# Altium PCB WPT_Reciever.PcbDoc
Units mil, origin at the board's own origin, x right, y up, seen from the top; angles counter-clockwise.
Board outline 1050 x 1140 mil, 2 copper layers (Top Layer, Bottom Layer); 12 components, 11 nets, 24 pads, 0 vias.
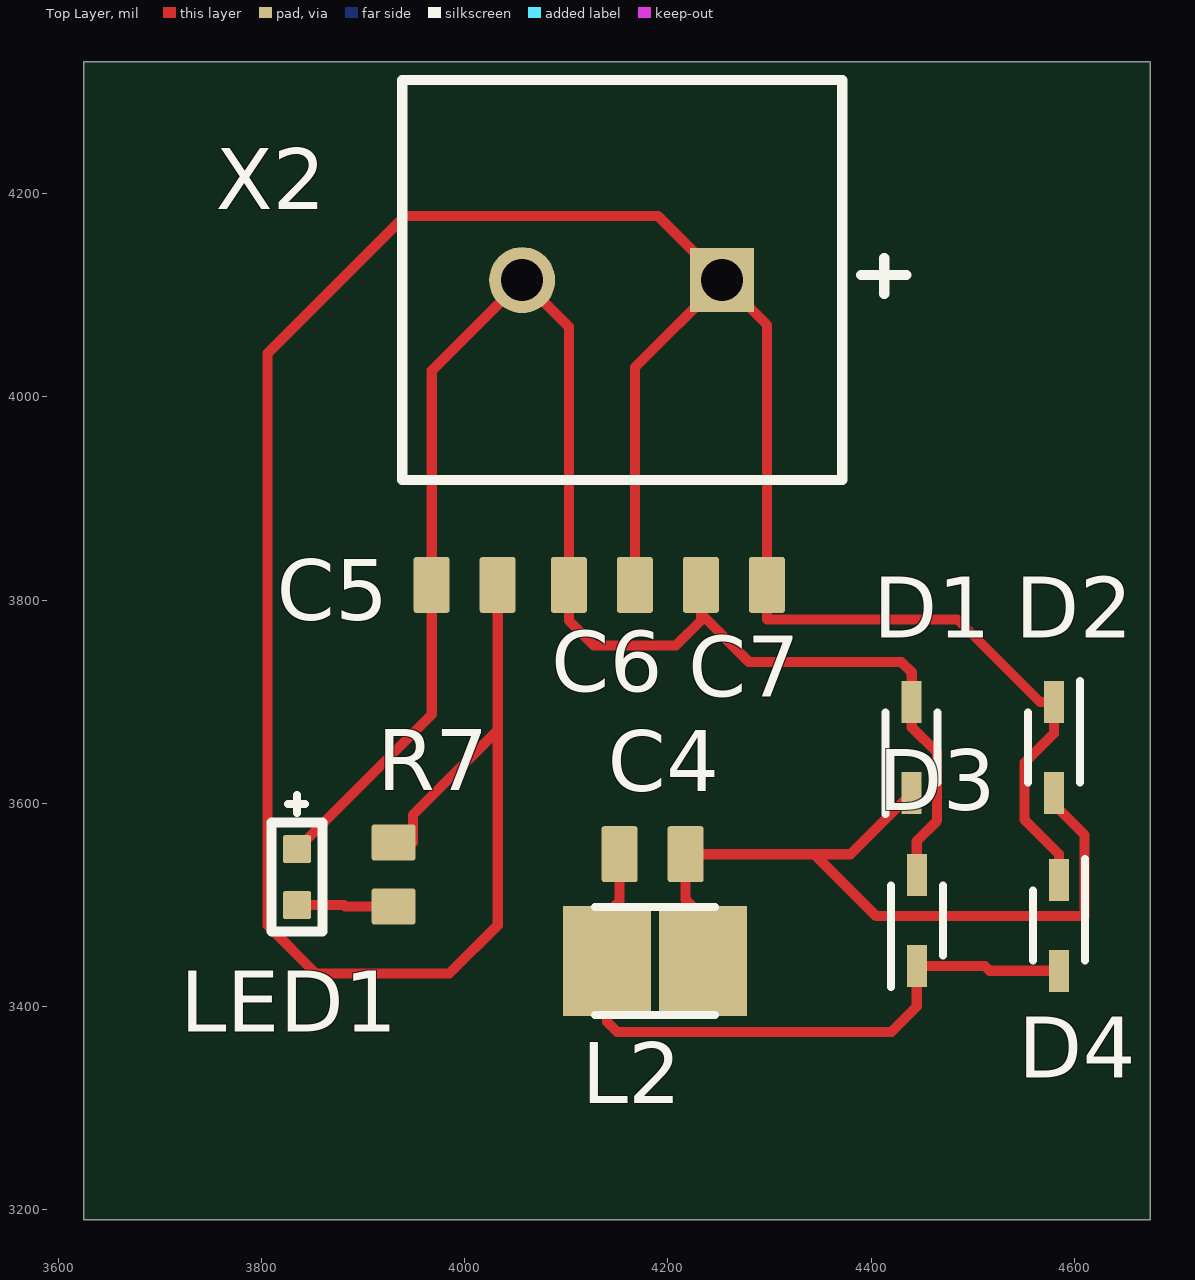
[diagram p0: Top Layer view]
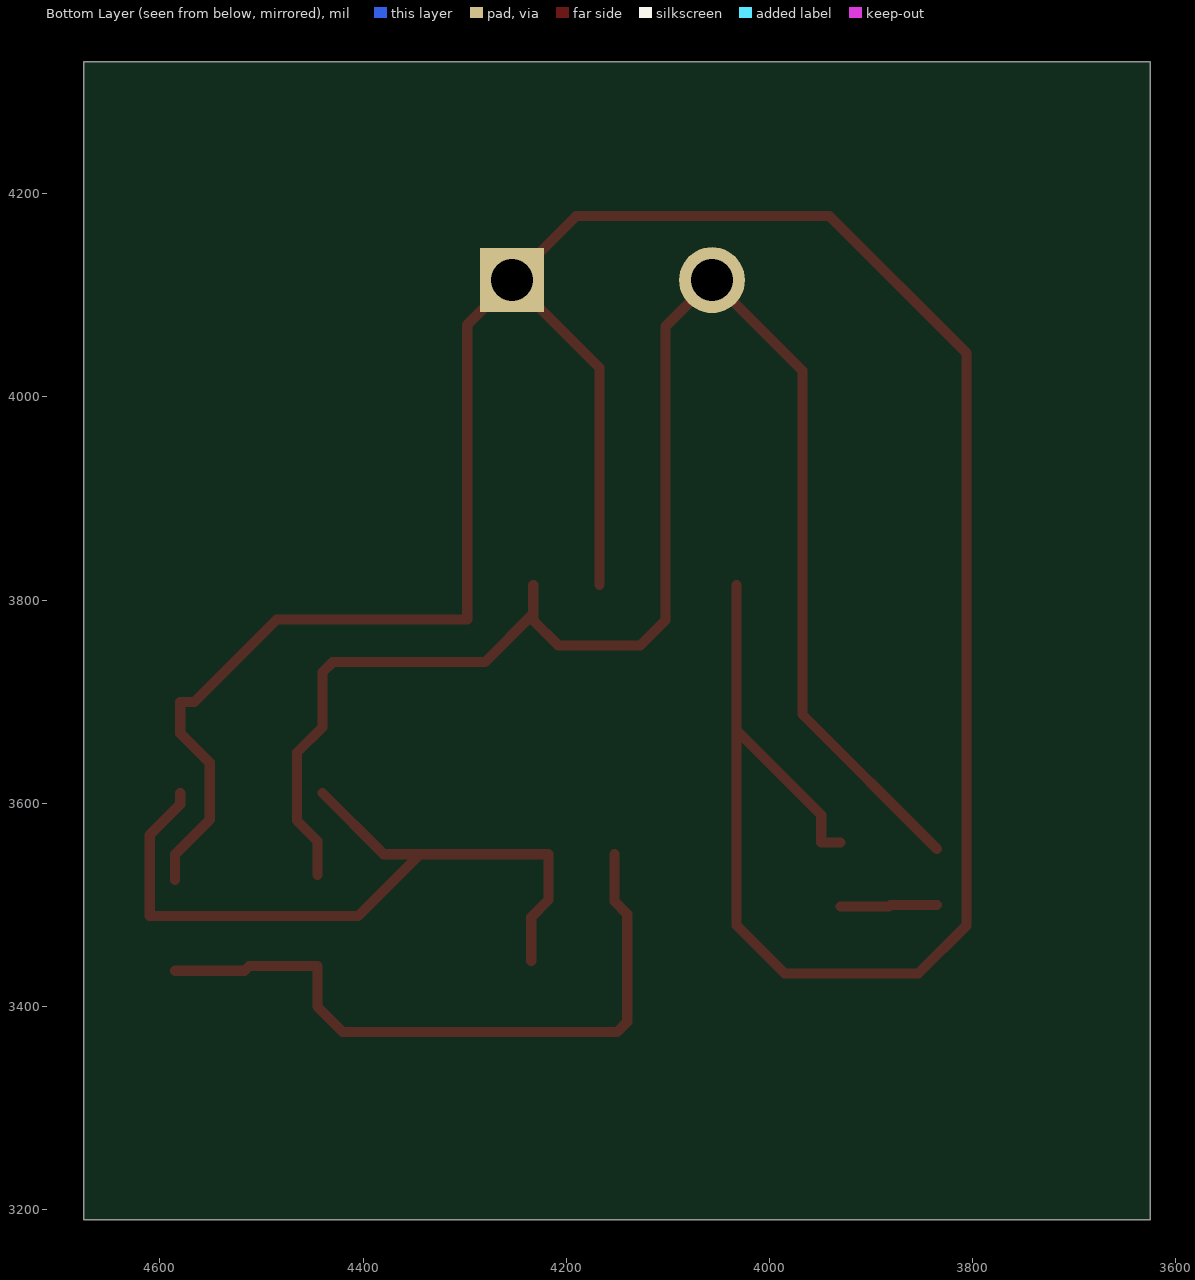
[diagram p1: Bottom Layer view, seen from below]
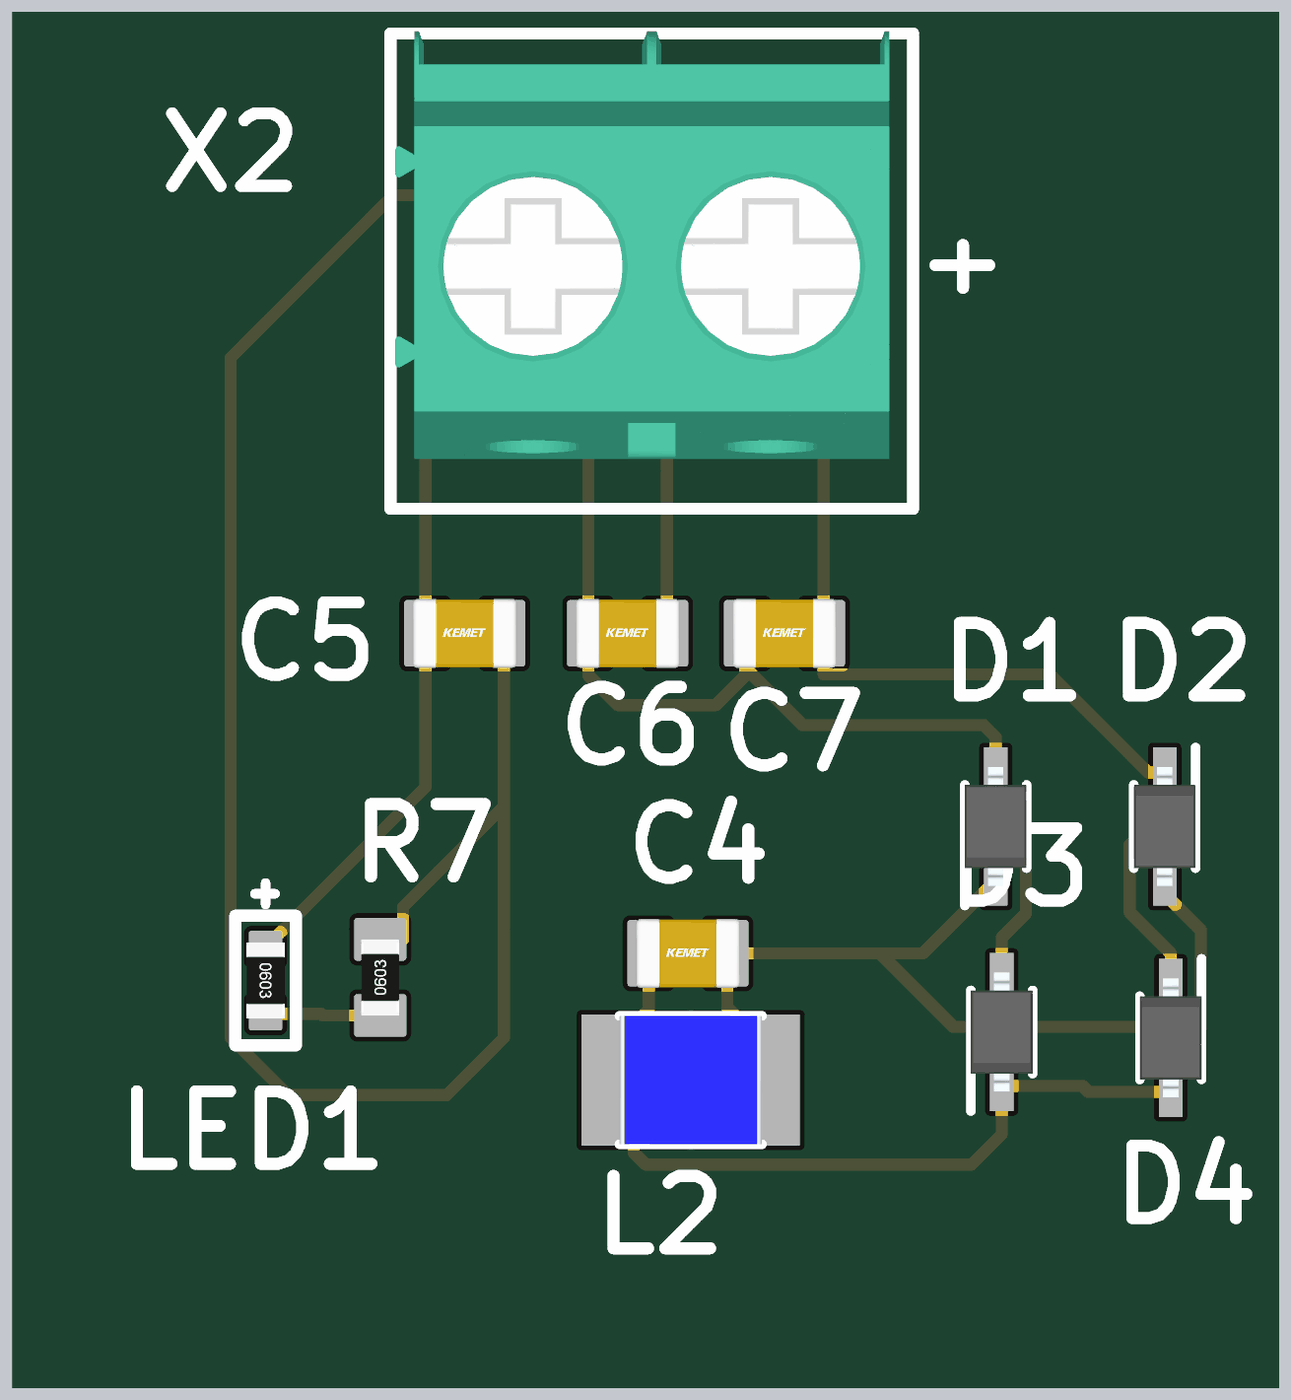
[diagram p2: 3D render of the assembled board from above, using the file's embedded part models]

## Layer stack, top to bottom
Top Solder: solder mask 0.4, Solder Resist, Dk 3.5
Top Layer: signal copper 1.4
Dielectric 1: dielectric 12.6, FR-4, Dk 4.8
Bottom Layer: signal copper 1.4
Bottom Solder: solder mask 0.4, Solder Resist, Dk 3.5

## Board outline
3625,3190 3625,4330 4675,4330 4675,3190

## Design rules (kind name [scope] priority, off if disabled: settings)
Clearance [All] p1: gap=10 ignorepadtopadclearanceinfootprint=FALSE except(0: Arc-Hole Track-Hole SMDPad-Hole THPad-Hole Via-Hole Fill-Hole Poly-Hole Region-Hole Text-Hole)
PolygonConnect [All] p1: connectstyle=Relief reliefconductorwidth=10 reliefentries=4 polygonreliefangle="90 Angle" airgapwidth=10
RoomDefinition WPT_.RecieverSchDoc [InComponentClass('WPT_.RecieverSchDoc')] p1: confinementstyle=ConfineIn formatcopy=TRUE lockcomponents=FALSE outline 4720,3070 5057.48,3070 5057.48,2545 4720,2545
RoutingVias [All] p1: holewidth=28 width=50 viastyle="Through Hole" minholewidth=28 minwidth=50 maxholewidth=28 maxwidth=50
SolderMaskExpansion [All] p1: expansion=4 istentingtop=FALSE
Width [All] p1: maxlimit=10 minlimit=10 preferedwidth=10
30 further rules are at their usual default settings.

## Components (designator, comment, footprint, x,y, rotation, side; value= is the part's Value field where it differs from the comment)
C4 "CL21A106KOCLRNC" CAP0805 4185,3550 r0 top value=10μF
C5 "CL21A106KOCLRNC" CAP0805 4000,3815 r0 top value=10μF
C6 "CL21A106KOCLRNC" CAP0805 4135,3815 r0 top value=10μF
C7 "CL21A106KOCLRNC" CAP0805 4265,3815 r0 top value=10μF
D1 "CUS520_H3F" SOD2513X115N 4440,3655 r90 top
D2 "CUS520_H3F" SOD2513X115N 4580,3655 r270 top
D3 "CUS520_H3F" SOD2513X115N 4445,3484.8 r90 top
D4 "CUS520_H3F" SOD2513X115N 4585,3480 r270 top
L2 "SRN3015-2R2M" INDPM3027X150N 4187.24,3445 r0 top
LED1 "LTST-S270GKT" LTST-S270GKT 3835,3527.44 r270 top
R7 "RC0603FR-07150RL" RES0603 3930,3530 r90 top value=150Ω
X2 "1934861" 1934861 4155,4115 r180 top

## Footprints (in the part's own frame and the unit in brackets; to place one, negate y for a bottom-side part, rotate by r counter-clockwise, add the part's x,y. Pads: shape width x height; smd on the part's side, far side on the other; paste and mask are expansions set on the pad)
1934861 [mm]
  rect 1.6x1.6 hole 1.05 mask+0.05: 1(-2.5,0)
  round 1.65 hole 1.05 mask+0.05: 2(2.5,0)
  silkscreen extent -7.1,-5 5.5,5, body extent -5,-5.05 5.4,3.95, height 11.41
CAP0805 [mm] "Chip Capacitor, Body 2.0x1.2mm, Height 0.45mm, IPC Medium Density"
  rrect15% 0.9x1.4 smd: 1(-0.825,0) 2(0.825,0)
  body extent -1.1,-0.73 1.1,0.72, height 1.39
INDPM3027X150N [mm]
  rect 2.2x2.75 smd: 1(-1.2,0) 2(1.2,0)
  silkscreen extent -1.5,-1.35 1.5,1.35, body extent -1.5,-1.35 1.5,1.35, height 1.5
LTST-S270GKT [mm] "SMD LED 0603"
  rrect15% 0.7x0.7 smd: 1(-0.7,0) 2(0.7,0)
  silkscreen extent -2.05,-0.64 1.36,0.64, body extent -0.8,-0.4 0.8,0.4, height 0.46
RES0603 [mm] "Chip Resistor, Body 1.6x0.8mm, IPC Medium Density"
  rrect15% 0.9x1.1 smd: 1(-0.8,0) 2(0.8,0)
  body extent -0.8,-0.4 0.8,0.4, height 0.46
SOD2513X115N [mm]
  rect 1.05x0.5 smd: 1(-1.138,0) 2(1.138,0)
  silkscreen extent -1.66,-0.65 0.87,0.65, body extent -1.25,-0.65 1.25,0.65, height 1.15

## Part data
C4 C5 C6 C7: "CAP CER 10UF 16V X5R 0805", Manufacturer 1="Samsung Electro-Mechanics", Supplier Part Number 1=1276-2399-2-ND, Voltage Rating=16V, Manufacturer Part Number 1=CL21A106KOCLRNC, Supplier 1=Digi-Key
D1 D2 D3 D4: "Schottky Diodes & Rectifiers Single Low Leakge", Manufacturer_Name=Toshiba, Manufacturer_Part_Number=CUS520,H3F, Mouser Part Number=757-CUS520H3F, Datasheet Link=https://toshiba.semicon-storage.com/info/docget.jsp?did=7041&prodName=CUS520, Geometry.Height=1.15mm, Mouser Price/Stock=https://www.mouser.co.uk/ProductDetail/Toshiba/CUS520H3F?qs=cW4DzVrAanMh8DRQGiUcZw%3D%3D
L2: "Power Inductor semi-shielded SMD 2.2uH Bourns SRN3015 Series Shielded Wire-wound SMD Inductor with a Ferrite Core, 2.2 uH +/-20% 1.8A Idc", Manufacturer_Name=Bourns, Mouser Part Number=652-SRN3015-2R2M, Geometry.Height=1.5mm, Manufacturer_Part_Number=SRN3015-2R2M, Mouser Price/Stock=https://www.mouser.co.uk/ProductDetail/Bourns/SRN3015-2R2M?qs=opBjA1TV9012ipbB8adgog%3D%3D
LED1: "LED GREEN CLEAR SMD R/A", Manufacturer 1="Lite-On Inc.", Supplier Part Number 1=160-1475-2-ND, Manufacturer Part Number 1=LTST-S270GKT, Supplier 1=Digikey
R7: "RES 150 OHM 1% 1/10W 0603", Manufacturer 1=Yageo, Power Rating=1/10W, Supplier Part Number 1=311-150HRTR-ND, Manufacturer Part Number 1=RC0603FR-07150RL, Supplier 1=Digi-Key

## Nets (pads, with @x,y where several pads share a name; then routed paths per layer and width w, separated by ;. In a path a pad name is that pad's centre, name@x,y a point inside that pad or via, vN(x,y) a via of type N, cw(c..) or ccw(c..) an arc to the next point about the centre after c; other vN are vias at no path point)
+5: 
GND: C5.1 C6.1 C7.1 D1.2 D3.2 LED1.1 X2.2 | length 1640.4
  Top Layer w10: LED1.1 3967.52,3687.52 C5.1 3967.52,4025.95 X2.2 4102.52,4069.05 C6.1 4102.52,3780 4127,3755.52 4208.04,3755.52 4232.52,3780 4232.52,3786.48 ; C7.1 4232.52,3786.48 ; D3.2 4445,3563 4465,3583 4465,3650 4440,3675 D1.2 4440,3729 4430,3739 4280,3739 4232.52,3786.48
NetB1_2: 
NetB1_3: 
NetB1_7: 
NetC2_2: 
NetC4_1: C4.1 D3.1 D4.2 L2.1 | length 671.7
  Top Layer w10: C4.1 4152.52,3503.52 4140,3491 L2.1 4140,3385 4150,3375 4420,3375 4445,3400 D3.1 4512,3440 4516.8,3435.2 D4.2
NetC4_2: C4.2 D1.1 D2.2 L2.2 | length 784.4
  Top Layer w10: L2.2 4234.49,3488 4217.48,3505.01 C4.2 4344,3550 ; D1.1 4379.8,3550 4344,3550 ; D2.2 4580,3599 4610,3569 4610,3489 4405,3489 4344,3550
NetC5_2: C5.2 C6.2 C7.2 D2.1 D4.1 R7.2 X2.1 | length 3062.5
  Top Layer w10: R7.2 3949,3561.5 3949,3588.52 4032.48,3672 ; C5.2 4032.48,3672 ; C6.2 4167.48,4029.05 X2.1 ; D4.1 4585,3550 4551,3584 4551,3640 4580,3669 D2.1 4566.2,3699.8 4485,3781 4297.48,3781 C7.2 4297.48,4070.95 X2.1 ; 4032.48,3672 4032.48,3480 3984.96,3432.48 3853.52,3432.48 3806,3480 3806,4043 3941,4178 4190.43,4178 X2.1
NetLED1_2: LED1.2 R7.1 | length 95.6
  Top Layer w10: LED1.2 3881,3499.88 3882.38,3498.5 R7.1
NetQ1_3: 

## Silkscreen, mask and mechanical layers (free items; w line width, h text height)
Mechanical 1:
  the board outline again, w10